# EAGLE board SPECCY2007.pcb (EAGLE 6.3), part 1 of 2
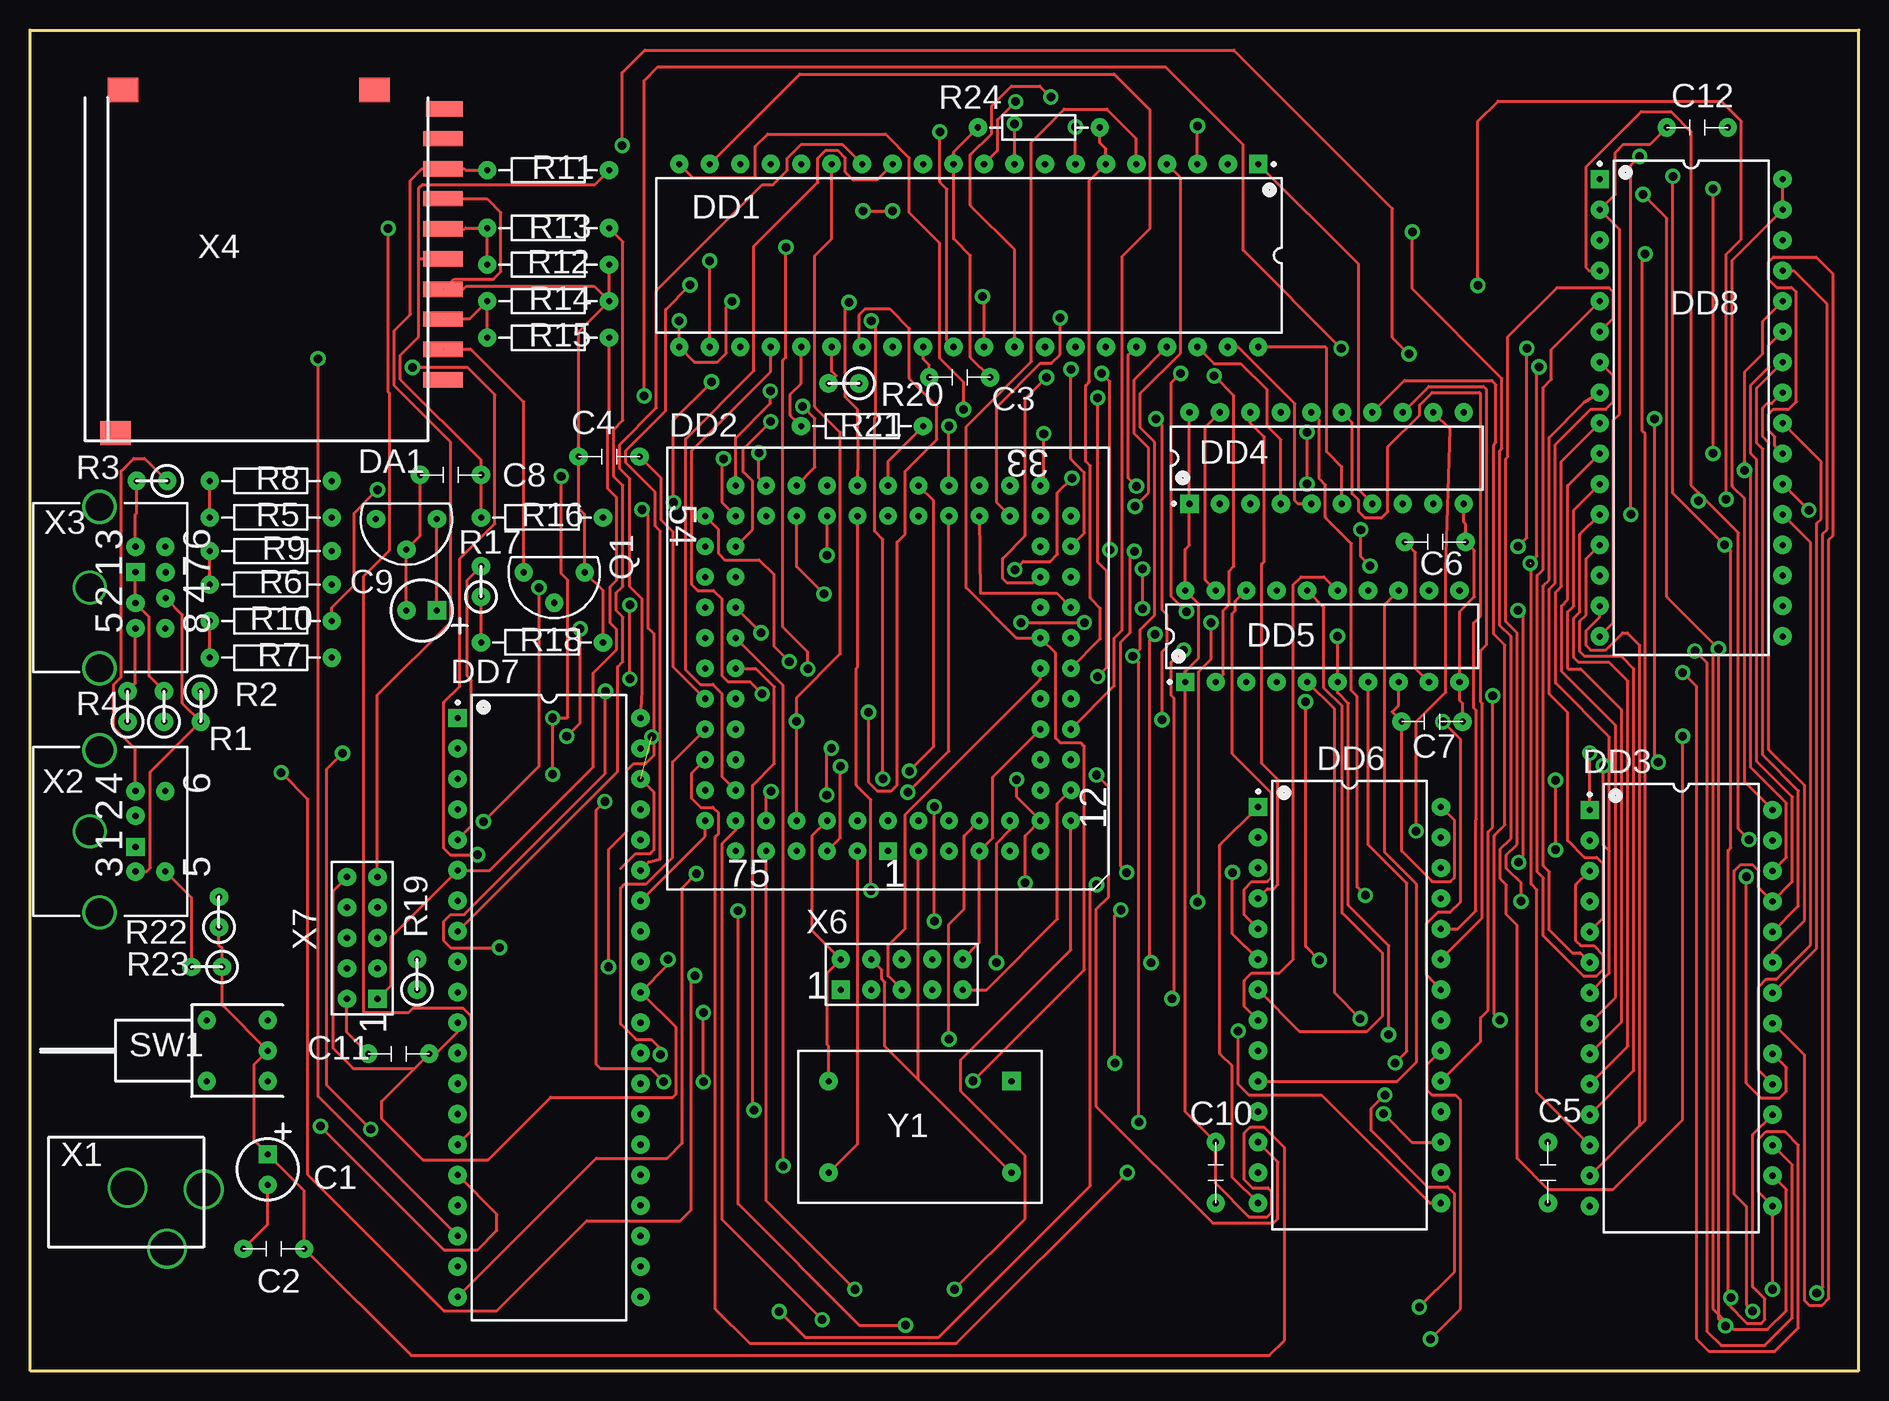
[diagram p0: board, top side]
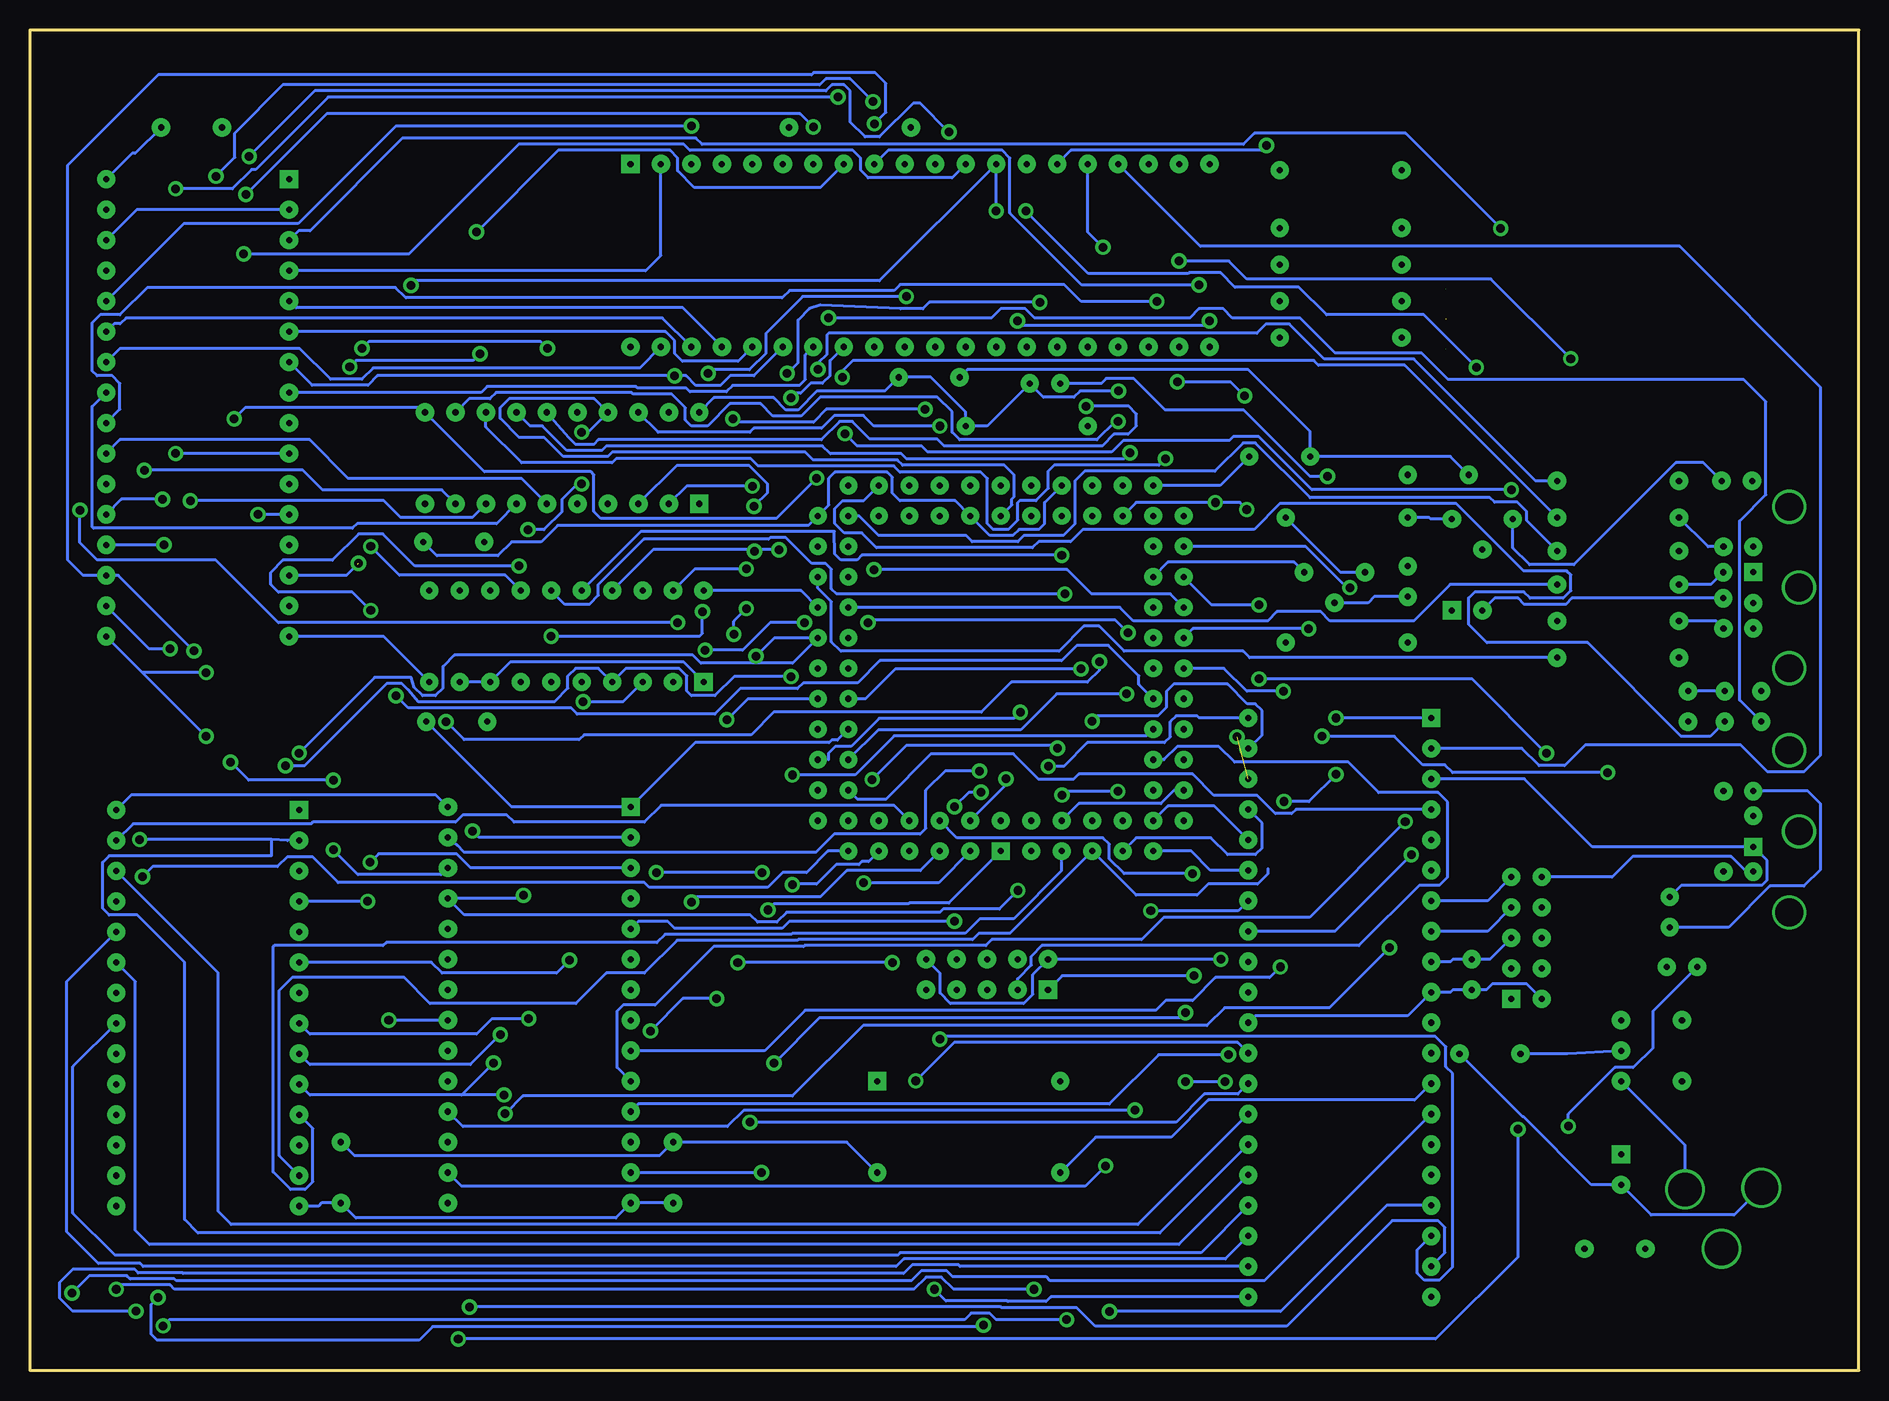
[diagram p1: board, bottom side, seen from below]

Size 152.4 x 111.76 mm. Coordinates in mm from the lower left corner, seen from the top.
Outline: 0,0 152.4,0 152.4,111.76 0,111.76 0,0
Copper layers (1*16): Top 0.035mm / dielectric 1.5mm / Bottom 0.035mm
Design rules "import-accel": minimum track width 10mil, minimum drill 24mil, track to track 8mil, track to pad 8mil, pad to pad 8mil, via to via 8mil, smd to smd 8mil, copper to edge 40mil, drill to drill 8mil, minimum pad ring 0mil, minimum via ring 0mil, stop-mask expansion 4mil, vias tented up to drill 0mil, thermal gap 10mil

## Footprints (pad centres in the part's own frame; a part is rotated, then mirrored left to right if it is on the bottom)
CAPPOL_2.54_1PRIMARY = drill 0.508 pad 1.524: 1 1.27,0 | drill 0.508 pad 1.524 square: 2 -1.27,0
CAP_5.08-7.8X3.2_1PRIMARY = drill 0.508 pad 1.524: 1 -2.54,0; 2 2.54,0
CAPPOL_2.54_2PRIMARY = drill 0.508 pad 1.524: 1 1.143,0.127 | drill 0.508 pad 1.524 square: 2 -1.397,0.127
TO92_1PRIMARY = drill 0.508 pad 1.524: 1 1.397,-2.413; 2 -1.143,0.127; 3 1.397,2.667
DIP-40_1PRIMARY = drill 0.508 pad 1.524 square: 1 -24.13,-7.62 | drill 0.508 pad 1.524: 2 -21.59,-7.62; 3 -19.05,-7.62; 4 -16.51,-7.62; 5 -13.97,-7.62; 6 -11.43,-7.62; 7 -8.89,-7.62; 8 -6.35,-7.62; 9 -3.81,-7.62; 10 -1.27,-7.62; 11 1.27,-7.62; 12 3.81,-7.62; 13 6.35,-7.62; 14 8.89,-7.62; 15 11.43,-7.62; 16 13.97,-7.62; 17 16.51,-7.62; 18 19.05,-7.62; 19 21.59,-7.62; 20 24.13,-7.62; 21 24.13,7.62; 22 21.59,7.62; 23 19.05,7.62; 24 16.51,7.62; 25 13.97,7.62; 26 11.43,7.62; 27 8.89,7.62; 28 6.35,7.62; 29 3.81,7.62; 30 1.27,7.62; 31 -1.27,7.62; 32 -3.81,7.62; 33 -6.35,7.62; 34 -8.89,7.62; 35 -11.43,7.62; 36 -13.97,7.62; 37 -16.51,7.62; 38 -19.05,7.62; 39 -21.59,7.62; 40 -24.13,7.62
PLCC84-SOCKET+ALTERAMAX700S_1PRIMARY = drill 0.508 pad 1.473 square: 1 -15.113,0.127 | drill 0.508 pad 1.473: 2 -12.573,0.127; 3 -15.113,-2.413; 4 -12.573,-2.413; 5 -15.113,-4.953; 6 -12.573,-4.953; 7 -15.113,-7.493; 8 -12.573,-7.493; 9 -15.113,-10.033; 10 -12.573,-10.033; 11 -15.113,-12.573; 12 -12.573,-15.113; 13 -12.573,-12.573; 14 -10.033,-15.113; 15 -10.033,-12.573; 16 -7.493,-15.113; 17 -7.493,-12.573; 18 -4.953,-15.113; 19 -4.953,-12.573; 20 -2.413,-15.113; 21 -2.413,-12.573; 22 0.127,-15.113; 23 0.127,-12.573; 24 2.667,-15.113; 25 2.667,-12.573; 26 5.207,-15.113; 27 5.207,-12.573; 28 7.747,-15.113; 29 7.747,-12.573; 30 10.287,-15.113; 31 10.287,-12.573; 32 12.827,-15.113; 33 15.367,-12.573; 34 12.827,-12.573; 35 15.367,-10.033; 36 12.827,-10.033; 37 15.367,-7.493; 38 12.827,-7.493; 39 15.367,-4.953; 40 12.827,-4.953; 41 15.367,-2.413; 42 12.827,-2.413; 43 15.367,0.127; 44 12.827,0.127; 45 15.367,2.667; 46 12.827,2.667; 47 15.367,5.207; 48 12.827,5.207; 49 15.367,7.747; 50 12.827,7.747; 51 15.367,10.287; 52 12.827,10.287; 53 15.367,12.827; 54 12.827,15.367; 55 12.827,12.827; 56 10.287,15.367; 57 10.287,12.827; 58 7.747,15.367; 59 7.747,12.827; 60 5.207,15.367; 61 5.207,12.827; 62 2.667,15.367; 63 2.667,12.827; 64 0.127,15.367; 65 0.127,12.827; 66 -2.413,15.367; 67 -2.413,12.827; 68 -4.953,15.367; 69 -4.953,12.827; 70 -7.493,15.367; 71 -7.493,12.827; 72 -10.033,15.367; 73 -10.033,12.827; 74 -12.573,15.367; 75 -15.113,12.827; 76 -12.573,12.827; 77 -15.113,10.287; 78 -12.573,10.287; 79 -15.113,7.747; 80 -12.573,7.747; 81 -15.113,5.207; 82 -12.573,5.207; 83 -15.113,2.667; 84 -12.573,2.667
DIP-28W_1PRIMARY = drill 0.508 pad 1.524 square: 1 -16.51,-7.62 | drill 0.508 pad 1.524: 2 -13.97,-7.62; 3 -11.43,-7.62; 4 -8.89,-7.62; 5 -6.35,-7.62; 6 -3.81,-7.62; 7 -1.27,-7.62; 8 1.27,-7.62; 9 3.81,-7.62; 10 6.35,-7.62; 11 8.89,-7.62; 12 11.43,-7.62; 13 13.97,-7.62; 14 16.51,-7.62; 15 16.51,7.62; 16 13.97,7.62; 17 11.43,7.62; 18 8.89,7.62; 19 6.35,7.62; 20 3.81,7.62; 21 1.27,7.62; 22 -1.27,7.62; 23 -3.81,7.62; 24 -6.35,7.62; 25 -8.89,7.62; 26 -11.43,7.62; 27 -13.97,7.62; 28 -16.51,7.62
DIP-20_1PRIMARY = drill 0.508 pad 1.524 square: 1 -11.43,-3.81 | drill 0.508 pad 1.524: 2 -8.89,-3.81; 3 -6.35,-3.81; 4 -3.81,-3.81; 5 -1.27,-3.81; 6 1.27,-3.81; 7 3.81,-3.81; 8 6.35,-3.81; 9 8.89,-3.81; 10 11.43,-3.81; 11 11.43,3.81; 12 8.89,3.81; 13 6.35,3.81; 14 3.81,3.81; 15 1.27,3.81; 16 -1.27,3.81; 17 -3.81,3.81; 18 -6.35,3.81; 19 -8.89,3.81; 20 -11.43,3.81
DIP-20_2PRIMARY = drill 0.508 pad 1.524 square: 1 -11.43,-3.81 | drill 0.508 pad 1.524: 2 -8.89,-3.81; 3 -6.35,-3.81; 4 -3.81,-3.81; 5 -1.27,-3.81; 6 1.27,-3.81; 7 3.81,-3.81; 8 6.35,-3.81; 9 8.89,-3.81; 10 11.43,-3.81; 11 11.43,3.81; 12 8.89,3.81; 13 6.35,3.81; 14 3.81,3.81; 15 1.27,3.81; 16 -1.27,3.81; 17 -3.81,3.81; 18 -6.35,3.81; 19 -8.89,3.81; 20 -11.43,3.81
DIP-40_2PRIMARY = drill 0.508 pad 1.524 square: 1 -24.13,-7.62 | drill 0.508 pad 1.524: 2 -21.59,-7.62; 3 -19.05,-7.62; 4 -16.51,-7.62; 5 -13.97,-7.62; 6 -11.43,-7.62; 7 -8.89,-7.62; 8 -6.35,-7.62; 9 -3.81,-7.62; 10 -1.27,-7.62; 11 1.27,-7.62; 12 3.81,-7.62; 13 6.35,-7.62; 14 8.89,-7.62; 15 11.43,-7.62; 16 13.97,-7.62; 17 16.51,-7.62; 18 19.05,-7.62; 19 21.59,-7.62; 20 24.13,-7.62; 21 24.13,7.62; 22 21.59,7.62; 23 19.05,7.62; 24 16.51,7.62; 25 13.97,7.62; 26 11.43,7.62; 27 8.89,7.62; 28 6.35,7.62; 29 3.81,7.62; 30 1.27,7.62; 31 -1.27,7.62; 32 -3.81,7.62; 33 -6.35,7.62; 34 -8.89,7.62; 35 -11.43,7.62; 36 -13.97,7.62; 37 -16.51,7.62; 38 -19.05,7.62; 39 -21.59,7.62; 40 -24.13,7.62
DIP-32/D41.2_1PRIMARY = drill 0.508 pad 1.524 square: 1 -19.05,-7.62 | drill 0.508 pad 1.524: 2 -16.51,-7.62; 3 -13.97,-7.62; 4 -11.43,-7.62; 5 -8.89,-7.62; 6 -6.35,-7.62; 7 -3.81,-7.62; 8 -1.27,-7.62; 9 1.27,-7.62; 10 3.81,-7.62; 11 6.35,-7.62; 12 8.89,-7.62; 13 11.43,-7.62; 14 13.97,-7.62; 15 16.51,-7.62; 16 19.05,-7.62; 17 19.05,7.62; 18 16.51,7.62; 19 13.97,7.62; 20 11.43,7.62; 21 8.89,7.62; 22 6.35,7.62; 23 3.81,7.62; 24 1.27,7.62; 25 -1.27,7.62; 26 -3.81,7.62; 27 -6.35,7.62; 28 -8.89,7.62; 29 -11.43,7.62; 30 -13.97,7.62; 31 -16.51,7.62; 32 -19.05,7.62
TO92_2PRIMARY = drill 0.508 pad 1.524: 1 1.27,-2.54; 2 -1.27,0; 3 1.27,2.54
RES-2.54_1PRIMARY = drill 0.508 pad 1.524: 1 -1.27,0; 2 1.27,0
RES_10.16_1PRIMARY = drill 0.508 pad 1.524: 1 -5.08,0; 2 5.08,0
SW_T_SPDT_1PRIMARY = drill 0.508 pad 1.524: 1 -2.54,2.286; 2 -2.54,-0.254; 3 -2.54,-2.794; 4 2.54,-2.794; 5 2.54,2.286
CONN_JACK_PWR_1PRIMARY = drill 2.794 pad 3.302: 1 2.54,-2.54; 2 -0.762,2.54; 3 -3.81,-2.413
MINI-DIN6_1PRIMARY = drill 0.508 pad 1.524 square: 1 0.66,-1.295 | drill 0.508 pad 1.524: 2 0.66,1.295; 3 0.66,-3.353; 4 0.66,3.353; 5 3.15,-3.353; 6 3.15,3.353 | drill 2.311 pad 2.845: 7 -2.337,-6.756; 8 -3.15,0; 9 -2.337,6.756
MINI-DIN8_1PRIMARY = drill 0.508 pad 1.524 square: 1 0.66,1.295 | drill 0.508 pad 1.524: 2 0.66,-1.295; 3 0.66,3.404; 4 3.175,-0.889; 5 0.66,-3.404; 6 3.15,3.404; 7 3.175,1.27; 8 3.15,-3.404 | drill 2.311 pad 2.845: 9 -2.337,-6.731; 10 -3.15,0; 11 -2.337,6.731
SD_CARD_SOCKET_1PRIMARY = smd 1.27 x 3.302: 1 7.315,13.589; 2 4.801,13.589; 3 2.311,13.589; 4 -0.229,13.589; 5 -2.718,13.589; 6 -5.232,13.589; 7 -7.722,13.589; 8 -10.236,13.589; 9 9.855,13.589 | smd 1.27 x 3.048: 10 -12.725,13.716 | smd 2.032 x 2.54: 11 -14.3,7.874; 12 -14.3,-13.081; 13 14.3,-13.716 | drill 1.524 pad 1.524: 14 11.633,-10.541; 15 -12.522,-10.541
DOUBLE_ROW_PIN_STRIP_5_WAY_1PRIMARY = drill 0.508 pad 1.524 square: 1 -5.08,-1.27 | drill 0.508 pad 1.524: 2 -5.08,1.27; 3 -2.54,-1.27; 4 -2.54,1.27; 5 0,-1.27; 6 0,1.27; 7 2.54,-1.27; 8 2.54,1.27; 9 5.08,-1.27; 10 5.08,1.27
OSC14_1PRIMARY = drill 0.508 pad 1.524 square: 1 -7.62,-3.81 | drill 0.508 pad 1.524: 2 7.62,-3.81; 3 7.62,3.81; 4 -7.62,3.81

## Placement (x,y rotation side)
C1  47,0  [CAPPOL_2.54_1PRIMARY]  19.81,16.76 270 top
C2  0,1  [CAP_5.08-7.8X3.2_1PRIMARY]  20.32,10.16 180 top
C3  0,1  [CAP_5.08-7.8X3.2_1PRIMARY]  77.47,82.8 180 top
C4  0,1  [CAP_5.08-7.8X3.2_1PRIMARY]  48.26,76.2 180 top
C5  0,1  [CAP_5.08-7.8X3.2_1PRIMARY]  126.49,16.51 270 top
C6  0,1  [CAP_5.08-7.8X3.2_1PRIMARY]  117.09,69.09 0 top
C7  0,1  [CAP_5.08-7.8X3.2_1PRIMARY]  116.84,54.1 0 top
C8  0,1  [CAP_5.08-7.8X3.2_1PRIMARY]  35.05,74.68 180 top
C9  47,0  [CAPPOL_2.54_2PRIMARY]  32.51,63.5 180 top
C10  0,1  [CAP_5.08-7.8X3.2_1PRIMARY]  98.81,16.51 270 top
C11  0,1  [CAP_5.08-7.8X3.2_1PRIMARY]  30.73,26.42 0 top
C12  0,1  [CAP_5.08-7.8X3.2_1PRIMARY]  138.94,103.63 180 top
DA1  LP2950  [TO92_1PRIMARY]  31.5,69.6 90 top
DD1  Z80A  [DIP-40_1PRIMARY]  78.23,92.96 180 top
DD2  EPM7128S/PLCC  [PLCC84-SOCKET+ALTERAMAX700S_1PRIMARY]  71.63,58.42 90 top
DD3  CY62256  [DIP-28W_1PRIMARY]  137.59,30.23 270 top
DD4  74HCT245  [DIP-20_1PRIMARY]  108.05,76.07 0 top
DD5  74HCT245  [DIP-20_2PRIMARY]  107.7,61.21 0 top
DD6  CY62256  [DIP-28W_1PRIMARY]  109.96,30.48 270 top
DD7  ATMEGA16  [DIP-40_2PRIMARY]  43.26,30.28 270 top
DD8  AT29C020  [DIP-32/D41.2_1PRIMARY]  138.43,80.26 270 top
Q1  BC557  [TO92_2PRIMARY]  43.69,65.28 90 top
R1  4K7  [RES-2.54_1PRIMARY]  11.18,55.37 90 top
R2  2K2  [RES-2.54_1PRIMARY]  14.22,55.37 270 top
R3  100  [RES-2.54_1PRIMARY]  10.16,74.17 180 top
R4  330  [RES-2.54_1PRIMARY]  8.13,55.37 90 top
R5  470  [RES_10.16_1PRIMARY]  20.07,71.12 180 top
R6  470  [RES_10.16_1PRIMARY]  20.07,65.53 180 top
R7  470  [RES_10.16_1PRIMARY]  20.07,59.44 180 top
R8  330  [RES_10.16_1PRIMARY]  20.07,74.17 180 top
R9  330  [RES_10.16_1PRIMARY]  20.07,68.33 180 top
R10  330  [RES_10.16_1PRIMARY]  20.07,62.48 180 top
R11  10K  [RES_10.16_1PRIMARY]  43.18,100.08 180 top
R12  2K2  [RES_10.16_1PRIMARY]  43.18,92.2 0 top
R13  1K  [RES_10.16_1PRIMARY]  43.18,95.25 180 top
R14  2K2  [RES_10.16_1PRIMARY]  43.18,89.15 0 top
R15  1K  [RES_10.16_1PRIMARY]  43.18,86.11 180 top
R16  10K  [RES_10.16_1PRIMARY]  42.67,71.12 180 top
R17  2K2  [RES-2.54_1PRIMARY]  37.59,65.79 90 top
R18  2K2  [RES_10.16_1PRIMARY]  42.67,60.71 180 top
R19  10K  [RES-2.54_1PRIMARY]  32.26,33.02 90 top
R20  10K  [RES-2.54_1PRIMARY]  67.82,82.3 180 top
R21  10K  [RES_10.16_1PRIMARY]  69.34,78.74 180 top
R22  4K7  [RES-2.54_1PRIMARY]  15.75,38.23 90 top
R23  4K7  [RES-2.54_1PRIMARY]  14.73,33.66 180 top
R24  2K2  [RES_10.16_1PRIMARY]  84.07,103.63 0 top
SW1  SW_T_SPDT  [SW_T_SPDT_1PRIMARY]  17.27,26.42 180 top
X1  X3  [CONN_JACK_PWR_1PRIMARY]  10.67,12.7 180 top
X2  X6  [MINI-DIN6_1PRIMARY]  8.13,44.96 0 top
X3  X8  [MINI-DIN8_1PRIMARY]  8.13,65.28 0 top
X4  X9  [SD_CARD_SOCKET_1PRIMARY]  20.83,92.46 270 top
X6  X10  [DOUBLE_ROW_PIN_STRIP_5_WAY_1PRIMARY]  72.64,33.02 0 top
X7  X10  [DOUBLE_ROW_PIN_STRIP_5_WAY_1PRIMARY]  27.69,36.07 90 top
Y1  14MHz  [OSC14_1PRIMARY]  74.17,20.32 180 top

## Library data of the parts
C1-C12 DA1 DD1-DD8 Q1 R1-R24 SW1 X1-X4 X6 X7 Y1 = SPECCY2007

## Nets
A0: DD1.30 DD3.10 DD5.7 DD7.19 DD8.12
A1: DD1.31 DD3.9 DD5.6 DD8.11
A2: DD1.32 DD3.8 DD5.5 DD8.10
A3: DD1.33 DD3.7 DD5.4 DD8.9
A4: DD1.34 DD3.6 DD5.3 DD8.8
A5: DD1.35 DD3.5 DD5.2 DD8.7
A6: DD1.36 DD3.4 DD4.2 DD8.6
A7: DD1.37 DD3.3 DD4.3 DD8.5
A8: DD1.38 DD3.25 DD4.4 DD7.22 DD8.27
A9: DD1.39 DD3.24 DD4.5 DD7.23 DD8.26
A10: DD1.40 DD3.21 DD4.6 DD7.24 DD8.23
A11: DD1.1 DD3.23 DD4.7 DD7.25 DD8.25
A12: DD1.2 DD3.2 DD4.8 DD7.26 DD8.4
A13: DD1.3 DD3.26 DD4.9 DD7.27 DD8.28
A14: DD1.4 DD2.24 DD3.1 DD7.28
A15: DD1.5 DD2.25 DD7.29
AVR_INT: DD2.9 DD7.17
AVR_NOINT: DD2.6 DD7.20
AVR_RST: DD7.9 R19.2 X7.5
AVR_WAIT: DD2.15 DD7.4
B: DD2.33 R10.1
BB: DD2.28 R7.1
BG: DD2.27 R6.1
BR: DD2.29 R5.1
BUSRQ: DD1.25 R21.2
CLK: DD2.83 DD7.13 Y1.3
CLK_CPU: DD1.6 DD2.22 R24.2
D0: DD1.14 DD2.81 DD3.11 DD7.40 DD8.13
D1: DD1.15 DD2.80 DD3.12 DD7.39 DD8.14
D2: DD1.12 DD2.79 DD3.13 DD7.38 DD8.15
D3: DD1.8 DD2.77 DD3.15 DD7.37 DD8.17
D4: DD1.7 DD2.76 DD3.16 DD7.36 DD8.18
D5: DD1.9 DD2.75 DD3.17 DD7.35 DD8.19
D6: DD1.10 DD2.74 DD3.18 DD7.34 DD8.20
D7: DD1.13 DD2.73 DD3.19 DD7.33 DD8.21
G: DD2.34 R9.1
GND: C1.1 C2.2 C3.2 C4.2 C5.2 C6.2 C7.2 C8.2 C9.1 C10.2 C11.2 C12.2 DA1.2 DD1.29 DD2.7 DD2.19 DD2.32 DD2.42 DD2.47 DD2.59 DD2.72 DD2.82 DD3.14 DD4.10 DD5.10 DD6.1 DD6.14 DD7.11 DD7.31 DD8.2 DD8.16 DD8.30 Q1.1 R2.2 R12.2 R14.2 R18.1 X1.1 X2.3 X3.4 X4.3 X4.6 X6.2 X6.10 X7.10 Y1.2
INT: DD1.16 DD2.21
IOREQ: DD1.20 DD2.20
KCLK: DD7.16 R23.2 X2.5
KDAT: DD7.3 R22.2 X2.1
M1: DD1.27 DD2.16
MISO: DD7.7 R11.2 X4.7 X7.9
MOSI: DD7.6 R15.1 X7.1
MREQ: DD1.19 DD2.18
NETC8_1: C8.1 C9.2 DA1.1 R11.1 R16.2 X4.4
NETQ1_2: Q1.2 R17.1 R18.2
NETQ1_3: Q1.3 R16.1 X4.1
NETR1_2: R1.2 R2.1 X3.1 X3.2
NETR3_2: R3.2 X3.3
NETR4_2: R4.2 X3.5
NETR5_2: R5.2 R8.2 X3.6
NETR6_2: R6.2 R9.2 X3.7
NETR7_2: R7.2 R10.2 X3.8
NETR12_1: R12.1 R13.2 X4.5
NETR14_1: R14.1 R15.2 X4.2
NETSW1_1: SW1.1 X1.3
NMI: DD1.17 DD7.2
R: DD2.30 R8.1
RAM: DD2.11 DD3.20
RD: DD1.21 DD2.4 DD3.22 DD8.24
ROM: DD2.5 DD8.22
ROM0: DD7.14 DD8.29
ROM1: DD7.15 DD8.3
RST_CPU: DD1.26 DD2.1 DD7.1 R20.2
SCK: DD7.8 R13.1 X7.7
SDC: DD7.5 R17.2
SOUND: DD2.35 R1.1
SYNC: DD2.36 R4.1
TAPE_IN: DD2.12 DD7.21
TCK: DD2.62 X6.1
TDI: DD2.14 X6.9
TDO: DD2.71 X6.3
TMS: DD2.23 X6.5
VA0: DD2.56 DD5.13 DD6.10
VA1: DD2.52 DD5.14 DD6.9
VA2: DD2.50 DD5.15 DD6.8
VA3: DD2.48 DD5.16 DD6.7
VA4: DD2.45 DD5.17 DD6.6
VA5: DD2.40 DD5.18 DD6.5
VA6: DD2.39 DD4.18 DD6.4
VA7: DD2.44 DD4.17 DD6.3
VA8: DD2.46 DD4.16 DD6.25
VA9: DD2.49 DD4.15 DD6.24
VA10: DD2.51 DD4.14 DD6.21
VA11: DD2.55 DD4.13 DD6.23
VA12: DD2.57 DD4.12 DD6.2
VA13: DD2.60 DD4.11 DD6.26
VAGEN: DD2.10 DD4.19 DD5.19
VCC: C1.2 C2.1 C3.1 C4.1 C5.1 C6.1 C7.1 C10.1 C11.1 C12.1 DA1.3 DD1.11 DD2.3 DD2.13 DD2.26 DD2.38 DD2.43 DD2.53 DD2.66 DD2.78 DD3.28 DD4.1 DD4.20 DD5.1 DD5.8 DD5.9 DD5.20 DD6.28 DD7.10 DD7.30 DD8.31 DD8.32 R3.1 R19.1 R20.1 R21.1 R22.1 R23.1 R24.1 SW1.2 X2.4 X6.4 X7.2 Y1.4
VD0: DD2.68 DD6.11
VD1: DD2.69 DD6.12
VD2: DD2.70 DD6.13
VD3: DD2.61 DD6.15
VD4: DD2.63 DD6.16
VD5: DD2.64 DD6.17
VD6: DD2.65 DD6.18
VD7: DD2.67 DD6.19
VRAM: DD2.58 DD6.20
VRD: DD2.54 DD6.22
VWR: DD2.41 DD6.27
WAIT_CPU: DD1.24 DD2.17
WR: DD1.22 DD2.8 DD3.27 DD7.18